# Altium PCB Power.PcbDoc
Units mil, origin at the board's own origin, x right, y up, seen from the top; angles counter-clockwise.
Board outline 1220.47 x 2874.02 mil, 2 copper layers (Top Layer, Bottom Layer), stack 21 mil thick; 108 components, 65 nets, 355 pads, 203 vias.
Unrouted connection lines stored in the file: 51.
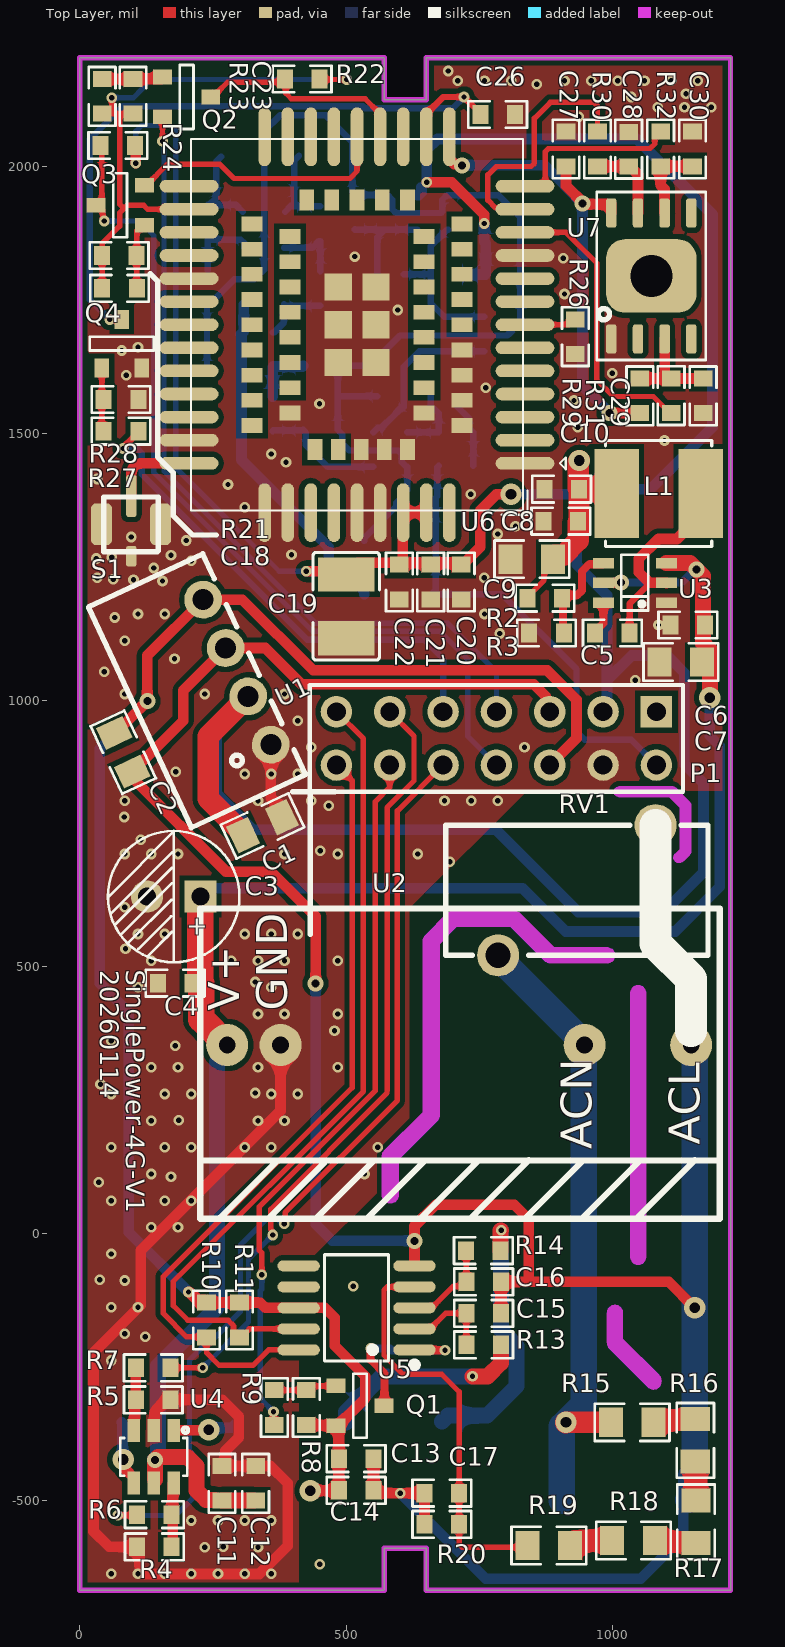
[diagram p0: Top Layer view]
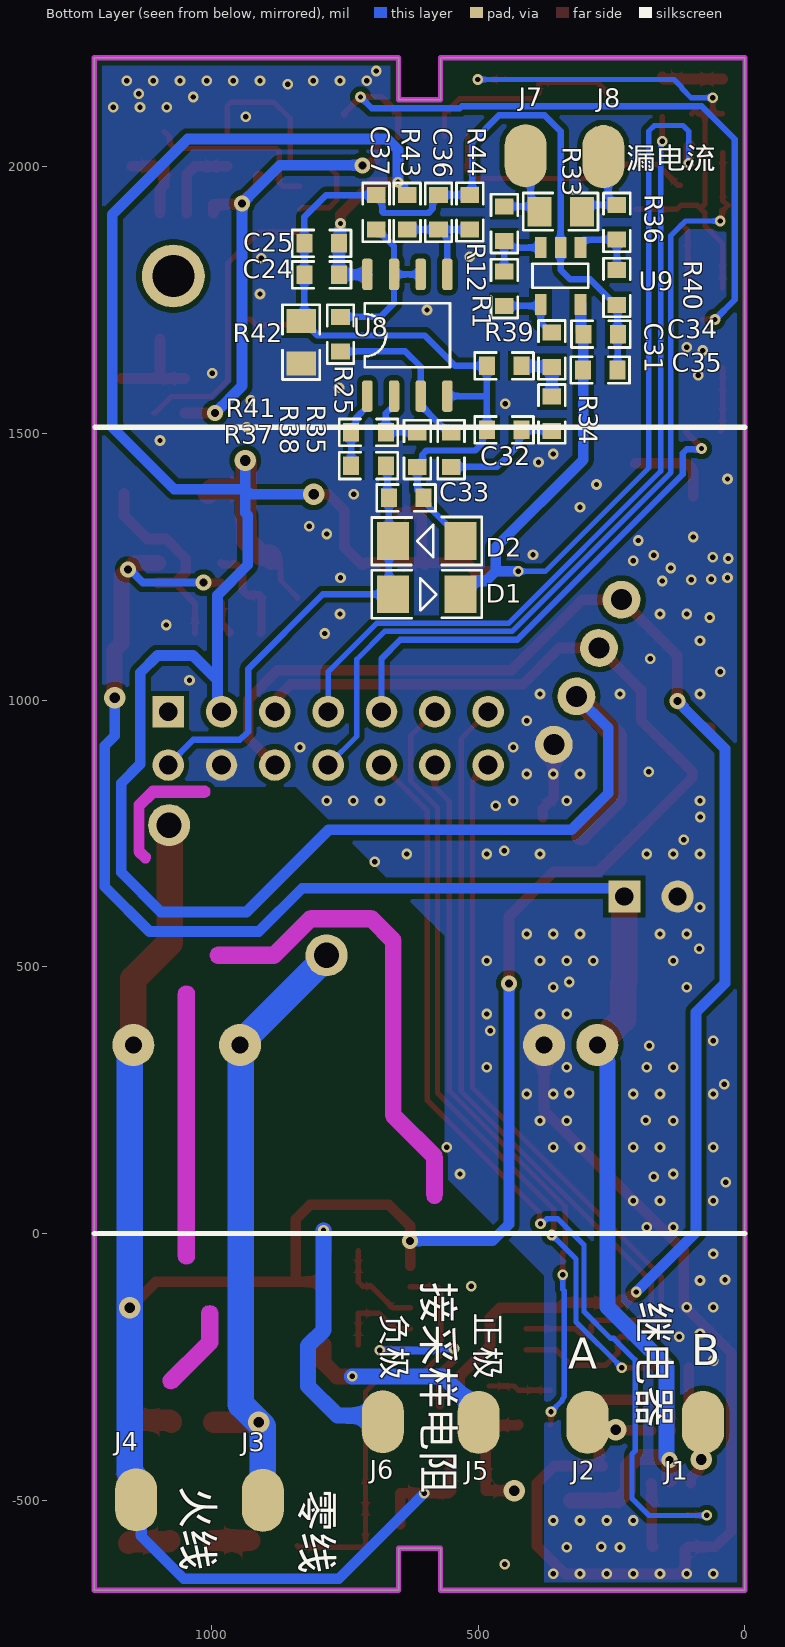
[diagram p1: Bottom Layer view, seen from below]

## Layer stack, top to bottom
Top Solder: solder mask 0.4, Solder Resist, Dk 3.5
Top Layer: signal copper 1.4
Dielectric 2: prepreg 2.8, Composite dielectric, Dk 4.1
Dielectric 1: prepreg 12.6, Composite dielectric, Dk 4.1
Dielectric 3: prepreg 2.8, Composite dielectric, Dk 4.1
Bottom Layer: signal copper 1.4
Bottom Solder: solder mask 0.4, Solder Resist, Dk 3.5

## Board outline
0,-669.29 0,2204.72 570.87,2204.72 570.87,2125.98 649.61,2125.98 649.61,2204.72 1220.47,2204.72 1220.47,-669.29 649.61,-669.29 649.61,-590.55 570.87,-590.55 570.87,-669.29
cut-out: 567.17,71.31 567.17,144.13 cw(c582.18,144.13) 571.58,154.76 571.56,154.75 644.25,227.44 644.25,548.67 cw(c659.27,548.67) 648.66,559.3 648.65,559.29 689.62,600.26 689.61,600.25 cw(c700.24,589.64) 700.24,604.66 814.69,604.66 cw(c814.69,589.64) 825.32,600.25 825.31,600.26 889.11,536.46 988.56,536.46 cw(c988.56,521.44) 1003.57,521.44 cw(c988.56,521.44) 988.56,506.43 882.89,506.43 cw(c882.89,521.44) 872.26,510.84 872.28,510.82 808.47,574.63 706.46,574.63 674.28,542.45 674.28,221.22 cw(c659.27,221.22) 669.87,210.59 669.88,210.6 597.19,137.91 597.19,71.31 cw(c582.18,71.31)
cut-out: 1124.18,694.8 cw(c1124.18,704.82) 1118.61,713.14 1126.16,720.68 1126.16,798.25 1106.2,818.21 1012.22,818.21 cw(c1012.22,828.23) 1012.22,838.24 1110.34,838.24 cw(c1110.34,828.23) 1117.43,835.31 1143.25,809.48 cw(c1136.17,802.4) 1146.19,802.4 1146.19,716.53 cw(c1136.17,716.53) 1143.25,709.45 1131.54,697.73 cw(c1124.45,704.82) 1124.45,694.8
cut-out: 1032.29,-43.1 ccw(c1047.3,-43.1) 1062.32,-43.1 1062.32,449.84 ccw(c1047.3,449.84) 1032.29,449.84
cut-out: 988.7,-204.62 ccw(c1003.72,-204.62) 993.11,-215.25 993.1,-215.24 1065.45,-287.59 ccw(c1076.06,-276.97) 1091.08,-276.97 ccw(c1076.06,-276.97) 1086.68,-266.35 1018.73,-198.4 1018.73,-149.81 ccw(c1003.72,-149.81) 988.7,-149.81

## Design rules (kind name [scope] priority, off if disabled: settings)
Clearance "Via to pad" [IsVia vs IsPad] p1: gap=10 ignorepadtopadclearanceinfootprint=FALSE
Clearance Ploy [InPoly] p2: gap=10 ignorepadtopadclearanceinfootprint=FALSE
Clearance "Track to pad" [IsTrack vs IsPad] p3: gap=8 ignorepadtopadclearanceinfootprint=FALSE
Clearance "Track to track" [IsTrack vs IsTrack] p4: gap=5 ignorepadtopadclearanceinfootprint=FALSE
Clearance "Via to Track" [IsVia vs IsTrack] p5: gap=10 ignorepadtopadclearanceinfootprint=FALSE
Clearance "Via To Via" [IsVia vs IsVia] p6: gap=10 ignorepadtopadclearanceinfootprint=FALSE
ComponentClearance [All] p1: gap=0 collisioncheckmode=3 verticalgap=0 showdistances=FALSE
DiffPairsRouting [All] p1: maxlimit=10 minlimit=7 mostfreqgap=7 toplayer_minwidth=5 toplayer_maxwidth=100 toplayer_prefwidth=7 bottomlayer_minwidth=5 bottomlayer_maxwidth=100 bottomlayer_prefwidth=7 maxuncoupledlength=500
HoleSize [All] p1: absolutevalues=TRUE maxlimit=200 minlimit=1 maxpercent=80.000 minpercent=20.000
HoleToHoleClearance [All] p1: gap=5 allowstackedmicrovias=TRUE
MinimumSolderMaskSliver [All] p1: minsoldermaskwidth=0
PolygonConnect [All vs (InPadClass('All Pads'))] p1: connectstyle=Direct reliefconductorwidth=10 reliefentries=4 polygonreliefangle="90 Angle" airgapwidth=10
PolygonConnect GND焊盘 [InNet('GND_1') vs (InPadClass('All Pads'))] p2: connectstyle=Relief reliefconductorwidth=10 reliefentries=4 polygonreliefangle="90 Angle" airgapwidth=10
PolygonConnect GND过孔 [All vs IsVia] p3: connectstyle=Direct reliefconductorwidth=10 reliefentries=4 polygonreliefangle="90 Angle" airgapwidth=10
RoutingVias RoutingVias_1 [InNet('AGND_1')] p1: holewidth=10 width=20 viastyle="Through Hole" minholewidth=10 minwidth=20 maxholewidth=28 maxwidth=50
RoutingVias [All] p2: holewidth=10 width=20 viastyle="Through Hole" minholewidth=10 minwidth=20 maxholewidth=28 maxwidth=50
SilkToSilkClearance [All] p1: silktosilkclearance=0
SilkToSolderMaskClearance [IsPad] p1: minsilkscreentomaskgap=0 clearancetoexposedcopper=TRUE
SolderMaskExpansion [All] p1: expansion=1 istentingtop=FALSE
Width [All] p1: maxlimit=300 minlimit=5 preferedwidth=7 minimp=50.000000 maximp=50.000000 favimp=50.000000
23 further rules are at their usual default settings.

## Classes and differential pairs
component class 漏电流检测: C24 C25 C31 C32 C33 C35 C36 C37 D1 D2 J7 J8 R1 R12 R25 R33 R34 R35 R36 R37 R38 R39 R40 R41 R42 R43 R44 U8 U9
component class 连接: P1
component class 继电器: C11 C12 J1 J2 R4 R5 R6 R7 U4
component class Power: C3 C4 C5 C6 C7 C8 C9 C10 L1 R2 R3 U2 U3
component class 4G: C18 C19 C20 C21 C22 C23 C26 C27 C28 C29 C30 Q2 Q3 Q4 R21 R22 R23 R24 R26 R27 R28 R29 R30 R31 R32 S1 U6 U7
component class 计量: C1 C2 C13 C14 C15 C16 C17 J3 J4 J5 J6 Q1 R8 R9 R10 R11 R13 R14 R15 R16 R17 R18 R19 R20 U1 U5

## Components (designator, comment, footprint, x,y, rotation, side; value= is the part's Value field where it differs from the comment)
C1 "4.7uF/25V" 0805R 306.58,746.97 r25 top
C2 "10uF/25V" 0805R 64.81,938.5 r295 top
C3 "100uF/25V" CAPPIND06 226.33,631.7 r180 top
C4 "104/25V" 0603R 146.72,469.16 r0 top
C5 "104/25V" 0603R 1031.23,1125.73 r180 top
C6 "10uF/25V" 0603R 1107.93,1140.82 r0 top
C7 "22uF/25V" 0805R 1167.2,1071.37 r180 top
C8 "10uF/25V" 0603R 869.67,1335.55 r0 top
C9 "47uF/10V" 0805R 887.91,1264.28 r180 top
C10 "104/10V" 0603R 871.31,1395.66 r0 top
C11 "22uF/25V" 0603R 266.89,-435.99 r270 top
C12 "104/25V" 0603R 330.17,-435.99 r270 top
C13 "104/25V" 0603R 551.09,-422.5 r180 top
C14 "10uF/25V" 0603R 551.09,-481.76 r180 top
C15 "68nF/10V" 0603R 725.1,-149.81 r0 top
C16 "68nF/10V" 0603R 725.1,-90.67 r0 top
C17 "10nF/10V" 0603R 711.6,-487.03 r180 top
C18 "1nF/10V/0603" 0603R 107.09,1772.25 r180 top
C19 "100uF/10V" C1210 499.88,1175.97 r270 top
C20 "10pF" 0603R 715.52,1253.93 r270 top
C21 "33pF" 0603R 658.09,1254.13 r270 top
C22 "100nF" 0603R 599.46,1253.93 r270 top
C23 "1nF/10V/0603" 0603R 100.03,2164.57 r270 top
C24 "10uF" 0603R 826.27,1797.55 r180 bottom
C25 "10uF" 0603R 826.27,1856.71 r180 bottom
C26 "10nF" 0603R 816.36,2097.98 r180 top
C27 "104" 0603R 912.04,2065.94 r270 top
C28 "33PF" 0603R 1029.32,2000.76 r90 top
C29 "33PF" 0603R 1169.25,1538.15 r90 top
C30 "33PF" 0603R 1149.32,2000.94 r90 top
C31 "0.1uF" 0603R 362.05,1624.41 r90 bottom
C32 "0.1uF" 0603R 419,1506.93 r0 bottom
C33 "0.1uF" 0603R 667.73,1379.35 r180 bottom
C34 "10uF" 0603R 237.62,1686.33 r0 bottom
C35 "0.1uF" 0603R 239.11,1619.1 r0 bottom
C36 "100nF/16V" 0603R 574.74,1882.26 r90 bottom
C37 "100nF/16V" 0603R 691.43,1882.06 r90 bottom
D1 "1N4148" 1206D 596.77,1198.48 r180 bottom
D2 "1N4148" 1206D 596.77,1298.44 r0 bottom
J1 "J1" 贴片焊盘V1（3*2椭圆） 78.74,-354.33 r270 bottom
J2 "J1" 贴片焊盘V1（3*2椭圆） 295.28,-354.33 r270 bottom
J3 "J1" 贴片焊盘V1（3*2椭圆） 904.13,-500.7 r270 bottom
J4 "J1" 贴片焊盘V1（3*2椭圆） 1141.73,-499.72 r270 bottom
J5 "J1" 贴片焊盘V1（3*2椭圆） 499.45,-354.33 r90 bottom locked
J6 "J1" 贴片焊盘V1（3*2椭圆） 679,-353 r270 bottom locked
J7 "J1" 贴片焊盘V1（3*2椭圆） 411.36,2020.83 r270 bottom
J8 "J1" 贴片焊盘V1（3*2椭圆） 265.46,2019.27 r270 bottom
L1 "4.7uH/3A" 贴片电感5020 1164.48,1387.51 r0 top
P1 "Header 7X2" HDR2X7 1081.52,978.23 r180 top
Q1 "AO3401" SOT-23 480.47,-285.9 r270 top
Q2 "S8050" SOT-23 155.35,2168.44 r270 top
Q3 "S8050" SOT-23 121.27,1890.5 r90 top
Q4 "S8050" SOT-23 41.61,1623.14 r0 top
R1 "300K/1%/0603" 0603r 451.35,1739.18 r90 bottom
R2 "40.2K" 0603R 839.68,1191.05 r0 top
R3 "103" 0603R 907.98,1125.73 r180 top
R4 "4.7K/5%" 0603R 107.46,-587.82 r0 top
R5 "4.7K/5%" 0603R 170.5,-311.98 r180 top
R6 "100R/5%" 0603r 107.45,-527.5 r0 top
R7 "100R/5%" 0603R 105.5,-251.97 r0 top
R8 "47K/5%/0603" 0603R 425.2,-293.88 r270 top
R9 "4.7K/5%/0603" 0603R 365.02,-293.88 r270 top
R10 "2K/5%/0603" 0603R 237.73,-194.78 r90 top
R11 "2K/5%/0603" 0603R 299.83,-194.78 r90 top
R12 "1K/1%/0603" 0603r 451.35,1925.85 r270 bottom
R13 "510R/1%" 0603R 790.1,-208.86 r180 top
R14 "510R/1%" 0603R 789.57,-32.38 r180 top
R15 "390K" 0805R 1076.06,-354.33 r180 top
R16 "390K" 0805R 1154.51,-428.09 r90 top
R17 "390K" 0805R 1155.81,-580.7 r90 top
R18 "390K" 0805R 998.58,-575.7 r0 top
R19 "390K" 0805R 839.83,-585.22 r0 top
R20 "510R/1%" 0603R 646.6,-545.57 r0 top
R21 "4.7K/5%/0603" 0603R 106.61,1833.82 r180 top
R22 "10K/5%/0603" 0603R 449.61,2164.57 r180 top
R23 "4.7K/5%/0603" 0603R 42.09,2164.57 r270 top
R24 "10K/5%/0603" 0603R 39.08,2039.9 r0 top
R25 "10K/1%/0603" 0603r 758.57,1718.85 r270 bottom
R26 "4.7K" 0603R 929.34,1714.05 r270 top
R27 "4.7K" 0603R 110.13,1504.43 r180 top
R28 "47K" 0603R 45.14,1563.85 r0 top
R29 "10K" 0603R 1050.33,1538.15 r90 top
R30 "0R" 0603R 971.08,2000.94 r90 top
R31 "0R" 0603R 1109.08,1538.34 r90 top
R32 "0R" 0603R 1089.34,2000.94 r90 top
R33 "100R/1%" 0805R 305.6,1916.07 r0 bottom
R34 "15.8K/1%/0603" 0603r 362.05,1504.43 r90 bottom
R35 "10K/1%/0603" 0603r 550.89,1502.24 r270 bottom
R36 "1K/1%/0603" 0603r 240.13,1863.57 r90 bottom
R37 "100R/1%/0603" 0603r 673.3,1439.74 r0 bottom
R38 "10K/1%/0603" 0603r 614.4,1502.24 r270 bottom
R39 "150K/1%/0603" 0603r 484,1626.91 r180 bottom
R40 "300K/1%/0603" 0603r 240.13,1741.35 r90 bottom
R41 "10K/1%/0603" 0603r 738.3,1502.24 r180 bottom
R42 "0R/5%/0805" 0805R 832.15,1631.35 r90 bottom
R43 "20K/1%/0603" 0603r 633.39,1947.06 r270 bottom
R44 "20K/1%/0603" 0603r 515.9,1882.65 r90 bottom
RV1 "7S561K" 10D821K 932.24,643.49 r0 top
S1 "SMA" RF1-00283天线座 44.88,1380.79 r0 top
U1 "B0303S" B1205S-1WR3 1005.71,-606.96 r115 top
U2 "X1071    90-240V" X1071 1146.8,353.29 r180 top locked
U3 "DIO6930" SOT-23-6DBV 1100.3,1182.32 r90 top
U4 "BL8023FCBT6R" SOT-23-6 176.33,-369.85 r180 top
U5 "BL0942" BL0942-10pin 627.79,-218.29 r90 top
U6 "ML307A" ML307A 520.15,1703.9 r180 top locked
U7 "SIM_MFF2" VQFN8 1071.95,1795.33 r90 top
U8 "LM258" SO8 708.09,1570.04 r90 bottom
U9 "LM321MFX" SOT-23-5 308.4,1848.55 r0 bottom

## Footprints (in the part's own frame and the unit in brackets; to place one, negate y for a bottom-side part, rotate by r counter-clockwise, add the part's x,y. Pads: shape width x height; smd on the part's side, far side on the other; paste and mask are expansions set on the pad)
10D821K [mm]
  round 2 hole 1.2 copper offset 0,0: 1(-3.75,-3.1) 2(3.75,3.1)
  silkscreen extent -6.25,-3.1 6.25,3.1
0603R [mil]
  rect 30x35 smd: 1(0,0) 2(65,0)
  silkscreen extent -22,-25 88,25
0603r [mil]
  rect 30x35 smd: 1(0,0) 2(65,0)
  silkscreen extent -22,-25 88,25
0805R [mil]
  rect 45x55 smd: 1(0,0) 2(80,0)
  silkscreen extent -30,-35 110,35
1206D [mm]
  rect 1.524x1.8 smd: 1(1.6,0) 2(-1.6,0)
  silkscreen extent -2.62,-1.14 2.62,1.14
B1205S-1WR3 [mm]
  round 1.8 hole 1: 1(42.019,-1.451) 2(44.559,-1.451) 3(47.099,-1.451) 4(49.639,-1.451)
  silkscreen extent 40.03,-2.35 51.63,3.65
BL0942-10pin [mm]
  oval 0.525x2.014 smd: 1(0,0) 2(1,0) 3(2,0) 4(3,0) 5(4,0) 6(4,5.513) 7(3,5.513) 8(2,5.513) 9(1,5.513) 10(0,5.513)
  silkscreen extent -0.86,-0.15 4.53,4.28
C1210 [mm]
  rect 1.635x2.7 smd paste-100 mask+0.051: 1(-1.517,0) 2(1.517,0)
  silkscreen extent -2.56,-1.58 2.56,1.58
CAPPIND06 [mil]
  rect 60x60 hole 34: 1(0,0)
  round 60 hole 34: 2(100,0)
  silkscreen extent -73,-123 173,123
HDR2X7 [mm] "Connector; Header; 7x2 Position"
  rect 1.5x1.5 hole 0.9: 1(0,0)
  round 1.5 hole 0.9: 2(0,2.54) 3(2.54,0) 4(2.54,2.54) 5(5.08,0) 6(5.08,2.54) 7(7.62,0) 8(7.62,2.54) 9(10.16,0) 10(10.16,2.54) 11(12.7,0) 12(12.7,2.54) 13(15.24,0) 14(15.24,2.54)
  silkscreen extent -1.27,-1.27 16.51,3.81
ML307A [mm]
  oval 2.8x0.6 smd: 1(-8,6.6) 2(-8,5.5) 3(-8,4.4) 4(-8,3.3) 5(-8,2.2) 6(-8,1.1) 7(-8,0) 8(-8,-1.1) 9(-8,-2.2) 10(-8,-3.3) 11(-8,-4.4) 12(-8,-5.5) 13(-8,-6.6) 23(8,-6.6) 24(8,-5.5) 25(8,-4.4) 26(8,-3.3) 27(8,-2.2) 28(8,-1.1) 29(8,0) 30(8,1.1) 31(8,2.2) 32(8,3.3) 33(8,4.4) 34(8,5.5) 35(8,6.6)
  oval 0.6x2.8 smd: 14(-4.4,-8.95) 15(-3.3,-8.95) 16(-2.2,-8.95) 17(-1.1,-8.95) 18(0,-8.95) 19(1.1,-8.95) 20(2.2,-8.95) 21(3.3,-8.95) 22(4.4,-8.95) 36(4.4,8.95) 37(3.3,8.95) 38(2.2,8.95) 39(1.1,8.95) 40(0,8.95) 41(-1.1,8.95) 42(-2.2,8.95) 43(-3.3,8.95) 44(-4.4,8.95)
  rect 1x0.7 smd: 45(-5,4.8) 46(-5,3.6) 47(-5,2.4) 48(-5,1.2) 49(-5,0) 50(-5,-1.2) 51(-5,-2.4) 52(-5,-3.6) 53(-5,-4.8) 59(5,-4.8) 60(5,-3.6) 61(5,-2.4) 62(5,-1.2) 63(5,0) 64(5,1.2) 65(5,2.4) 66(5,3.6) 67(5,4.8) 73(-3.2,4.2) 74(-3.2,3) 75(-3.2,1.8) 76(-3.2,0.6) 77(-3.2,-0.6) 78(-3.2,-1.8) 79(-3.2,-3) 80(-3.2,-4.2) 81(3.2,-4.2) 82(3.2,-3) 83(3.2,-1.8) 84(3.2,-0.6) 85(3.2,0.6) 86(3.2,1.8) 87(3.2,3) 88(3.2,4.2)
  rect 0.7x1 smd: 54(-2.4,-5.95) 55(-1.2,-5.95) 56(0,-5.95) 57(1.2,-5.95) 58(2.4,-5.95) 68(2,5.95) 69(0.9,5.95) 70(-0.2,5.95) 71(-1.3,5.95) 72(-2.4,5.95)
  rect 1.3x1.3 smd: 89(-0.9,1.8) 90(-0.9,0) 91(-0.9,-1.8) 92(0.9,-1.8) 93(0.9,0) 94(0.9,1.8)
  silkscreen extent -9.94,-8.85 7.9,9.05
RF1-00283天线座 [mil]
  rrect50% 19.68x78.74 smd: 1(52,2)
  rrect50% 39.37x78.74 smd: 2(-4,-51) 2(107,-51)
  rrect50% 19.68x39.37 smd: 2(52,-111)
  silkscreen extent 0,-102 102,0
SO8 [mm]
  rrect50% 1.5x0.5 smd: 1(0,0) 2(0,-1.27) 3(0,-2.54) 4(0,-3.81) 5(5.8,-3.81) 6(5.8,-2.54) 7(5.8,-1.27) 8(5.8,0)
  silkscreen extent 1.38,-3.94 4.42,0.13
SOT-23 [mm]
  rect 0.7x0.9 smd: 1(0,0) 2(1.9,0) 3(0.95,2.3)
  silkscreen extent -0.57,0.82 2.47,1.47
SOT-23-5 [mm]
  rect 0.55x1 smd: 1(0,0) 2(0.95,0) 3(1.9,0) 4(1.9,2.7) 5(0,2.7)
  silkscreen extent -0.37,0.76 2.29,1.91
SOT-23-6 [mm]
  rect 0.6x1.1 smd: 1(0,0) 2(0.95,0) 3(1.9,0) 4(1.9,2.5) 5(0.95,2.5) 6(0,2.5)
  silkscreen extent -0.69,-0.15 2.55,2.15
SOT-23-6DBV [mm]
  rect 0.5x1 smd: 1(0,0) 2(0.95,0) 3(1.9,0) 4(1.9,3) 5(0.95,3) 6(0,3)
  silkscreen extent -0.37,0.86 2.29,2.16
VQFN8 [mm]
  rrect50% 3.5x4.3 smd: 0(0,0)
  round 3 hole 2: 0(0,0)
  rrect50% 1.4x0.5 smd: 1(-3,1.905) 2(-3,0.635) 3(-3,-0.635) 4(-3,-1.905) 5(3,-1.905) 6(3,-0.635) 7(3,0.635) 8(3,1.905)
  silkscreen extent -4,-2.6 4,2.6
X1071 [mm]
  round 2 hole 0.8: 1(0,0) 2(5.08,0) 4(19.56,0) 5(22.1,0)
  silkscreen extent -1.36,-6.5 23.38,8.28
贴片焊盘V1（3*2椭圆） [mm]
  oval 3x2 smd: 1(0,0)
贴片电感5020 [mm]
  rect 2.124x4.22 smd: 1(0,0) 2(-4,0)
  silkscreen extent -4.53,-2.53 0.53,2.53

## Part data
C1 C2: library part CAP+
C3 C7 C9 C19: library part "Cap Pol1", "Polarized Capacitor (Radial)", LatestRevisionDate=17-Jul-2002, LatestRevisionNote="Re-released for DXP Platform.", PackageDescription="Polarized Capacitor (Radial); 2 Leads", PackageReference=RB7.6-15, Published=8-Jun-2000, Publisher="Altium Limited"
C4 C5 C10 C11 C12 C13 C14 C20 C21 C22 C26: library part CAP_1
C6 C8 C15 C16 C17 C18 C23 C24 C25 C27 C28 C29 C30 C31 C32 C33 C34 C35 C36 C37: library part CAP
D1 D2: library part DIODE
L1: library part Inductor, "Inductor", Code_IEC=1005, Code_JEITA=0402, LatestRevisionDate=29-May-2009, LatestRevisionNote="IPC-7351 Footprint Added.", PackageDescription="Chip Inductor", PackageReference=0402-A, Published=8-Jun-2000, Publisher="Altium Limited"
P1: "Header, 7-Pin, Dual row", LatestRevisionDate=17-Jul-2002, LatestRevisionNote="Re-released for DXP Platform.", Publisher="Altium Limited"
Q1: library part PNP
Q2 Q3 Q4: library part NPN
R1 R4 R5 R6 R7 R8 R9 R10 R11 R12 R13 R14 R15 R16 R17 R18 R19 R20 R21 R23 R25 R26 R27 R28 R33 R34 R35 R36 R37 R38 R39 R40 R41 R42 R43 R44: library part RES
R2 R3 R22 R24 R29 R30 R31 R32: library part Res2, "Resistor", LatestRevisionDate=17-Jul-2002, LatestRevisionNote="Re-released for DXP Platform.", PackageDescription="Axial Device, Thru-Hole; 2 Leads; 0.4 in Pin Spacing", PackageReference=AXIAL-0.4, Published=8-Jun-2000, Publisher="Altium Limited"
RV1: library part "Res Varistor", "Varistor (Voltage-Sensitive Resistor)", Code_IPC=RESC2012, LatestRevisionDate=29-May-2009, LatestRevisionNote="IPC-7351 Footprint Added.", PackageDescription="Chip Resistor 0805 Case Size", PackageReference=6-0805, PackageVersion=Mar-2003, Published=24-Mar-1999, Publisher="Altium Limited"
U1: library part B0505S
U2: library part AD2DC_EMC
U3: library part BL8032
U4: library part BL8023HCB6TR, JLCPCB Part Class="Extended Part", LCSC Part Name="BL8023HCB6TR 继电器驱动芯片 停产", Manufacturer=BL(上海贝岭), Add into BOM=yes, Convert to PCB=yes, Datasheet=https://atta.szlcsc.com/upload/public/pdf/source/20190920/C431145_DEC39E836DB2A2F1462A8BB350F12ABB.pdf, Device=BL8023HCB6TR, Manufacturer Part=BL8023HCB6TR, Supplier=LCSC, Supplier Footprint=SOT-23-6, Supplier Part=C431145, Symbol=BL8023HCB6TR
U5: library part BL0942_C2837510, JLCPCB Part Class="Extended Part", LCSC Part Name=BL0942内置时钟免校准计量芯片, Manufacturer=BL(上海贝岭), Add into BOM=yes, Convert to PCB=yes, Datasheet=https://atta.szlcsc.com/upload/public/pdf/source/20220627/BFAD44701CA6DE9A8853C5A4834B6884.pdf, Device=BL0942_C2837510, Manufacturer Part=BL0942, Supplier=LCSC, Supplier Footprint=SSOP-10-150mil, Supplier Part=C2837510, Symbol=BL0942
U8: library part LM358
U6: PCB DECAL=MOD_ML307

## Via types
v1: diameter 20, hole 10, Top Layer to Bottom Layer, 186 vias
v2: diameter 30, hole 15, Top Layer to Bottom Layer, 9 vias
v3: diameter 40, hole 20, Top Layer to Bottom Layer, 8 vias

## Nets (pads, with @x,y where several pads share a name; then routed paths per layer and width w, separated by ;. In a path a pad name is that pad's centre, name@x,y a point inside that pad or via, vN(x,y) a via of type N, cw(c..) or ccw(c..) an arc to the next point about the centre after c; other vN are vias at no path point)
4G_MCU_RXD: P1.8 Q3.3 R24.1 | length 1644.6
  Top Layer w10: Q3.3 32.83,1927.9 41.61,1936.68 R24.1@41.61,2026.33 ; Q3.3@31.3,1927.9 40.08,1919.12 43.44,1919.12 43.44,1903.85 46.12,1901.17 v1(46.12,1898.47)
  Bottom Layer w10: v1(46.12,1898.47) 111.61,1898.47 139.01,1871.06 139.01,1427 437.04,1128.98 675.54,1128.98 728.02,1076.5 728.02,931.73 P1.8
4G_MCU_TXD: P1.7 Q2.2 | length 1519.6
  Top Layer w10: v1(155.35,2048.26) Q2.2
  Bottom Layer w10: v1(155.35,2048.26) 157.27,2046.35 157.27,2039.27 158.15,2038.39 158.15,1429.25 443.42,1143.98 690.62,1143.98 781.52,1053.08 P1.7
4G_Reset: P1.9 R27.1 | length 930.7
  Top Layer w12: v1(81.38,1471.68) 81.38,1473.18 110.13,1501.93 R27.1
  Bottom Layer w12: v1(81.38,1471.68) 82.79,1470.27 109.38,1470.27 116.61,1463.04 116.61,1423.39 427.02,1112.98 646.19,1112.98 681.52,1077.65 P1.9
AGND: C24.1 C25.1 C32.2 C33.2 C34.1 C35.1 C36.2 C37.2 D2.2 R38.2 R39.1 R40.1 R42.2 R44.2 U8.4 U9.2 | length 2312.8
  Bottom Layer w12: C35.1@238.6,1626.91 238.87,1627.19 238.87,1740.1 R40.1 242.63,1741.35 290.13,1788.85 327.55,1788.85 345.8,1807.1 U9.2 345.8,2066.6 375.59,2096.39 461.45,2096.39 511.49,2046.36 511.49,1952.06 516.09,1947.45 574.55,1947.45 C36.2 577.24,1947.26 586.24,1938.26 586.24,1920.47 593.27,1913.44 677.77,1913.44 679.93,1915.6 679.93,1938.06 688.93,1947.06 C37.2 785.15,1947.06 826.27,1905.95 C24.1 826.27,1717.23 R42.2 827.15,1711.35 810.65,1694.85 810.65,1692.73 801.7,1683.78 600.61,1683.78 543.73,1626.91 R39.1 484,1566.92 ; D2.2 533.78,1303.87 593.73,1363.83 593.73,1370.35 C33.2 602.73,1381.85 614.4,1393.52 R38.2 613.3,1437.24 604.3,1446.24 604.3,1461.1 597.27,1468.13 505.66,1468.13 492.4,1481.38 492.4,1498.53 C32.2 484,1566.92 ; U8.4 487.12,1570.04 484,1566.92
BL0942_Control: P1.12 R9.2 | length 1351.5
  Top Layer w10: v1(341.72,-77.43) 341.72,-36.37 337.04,-31.69 337.04,50.29 554.53,267.78 554.53,809.9 581.52,836.89 P1.12 ; v1(363.58,-334.61) 363.58,-357.43 R9.2
  Bottom Layer w10: v1(341.72,-77.43) 341.72,-104.64 338.93,-107.43 338.93,-305.72 cw(c295.28,-334.65) 343.72,-314.75 v1(363.58,-334.61)
BL0942_RXD: P1.13 R11.1 U5.9 | length 1555.8
  Top Layer w10: U5.9 318.19,-178.92 302.33,-194.78 298.24,-194.78 288.24,-184.78 288.24,-172.65 278.37,-162.79 202.85,-162.79 175.43,-135.37 175.43,-90.1 532,266.47 532,927.75 P1.13
BL0942_TXD: P1.14 R10.1 U5.10 | length 1508.8
  Top Layer w10: U5.10 354.07,-218.29 324.88,-247.48 261.75,-247.48 237.73,-223.46 237.73,-197.28 234.46,-194.01 200.72,-194.01 157,-150.29 157,-80.8 511,273.2 511,848.75 P1.14
GND: C1.2 C3.2 C4.1 C6.1 C7.2 C8.1 C9.2 C10.1 C11.1 C12.1 C19.2 C20.2 C21.2 C22.2 C26.1 C27.1 C28.2 C29.1 C30.2 P1.4 Q4.2 R3.2 R4.1 R5.1 R26.2 R28.2 R42.1 S1.2 U1.1 U2.4 U3.1 U4.2 U6.1 U6.10 U6.27 U6.34 U6.36 U6.37 U6.40 U6.41 U6.45 U6.46 U6.47 U6.48 U6.70 U6.71 U6.72 U6.73 U6.88 U6.89 U6.90 U6.91 U6.92 U6.93 U6.94 U7.1 | length 2228.5
  Top Layer w20: U4.2 140.74,-368.03 140.74,-334.44 155.7,-319.48 165.5,-319.48 170.5,-314.48 R5.1 267.05,-311.98 278.34,-323.27 298.24,-343.17 298.24,-382.54 273.3,-407.48 273.3,-430.99 268.3,-435.99 C11.1 ; C11.1@269.39,-435.99 C12.1 357.67,-435.99 390.02,-468.34 390.02,-585.7 337.02,-638.7 124.17,-638.7 112.46,-626.99 112.46,-592.82 R4.1 55.54,-587.82 26,-558.28 26,-223.53 114.7,-134.84 114.7,-32.13 376.72,229.89 U2.4 ; U1.1@358.35,929.2 U1.1 358.35,817.08 379.08,796.35 C1.2
  other v1: 59.27,-638.44 109.27,-638.44 159.27,-638.44 209.27,-638.44 259.27,-638.44 309.27,-638.44 359.27,-638.44 234.27,-588.44 334.27,-588.44 269.39,-587.82 209.27,-538.44 259.27,-538.44 309.27,-538.44 359.27,-538.44 59.27,-238.44 123,-194.01 84.27,-188.44 59.27,-138.44 109.27,-138.44 84.27,-88.44 37.39,-87.04 59.27,-38.44 134.27,11.56 184.27,11.56 59.27,61.56 159.27,61.56 209.27,61.56 36,96 171.33,106 134.27,111.56 534.27,111.56 59.27,161.56 159.27,161.56 209.27,161.56 309.27,161.56 359.27,161.56 559.27,161.56 134.27,211.56 186,212 334.27,211.56 384.27,211.56 59.27,261.56 159.27,261.56 209.27,261.56 359.27,261.56 409.27,261.56 329.35,263.2 39.02,279.55 134.27,311.56 184.27,311.56 334.27,311.56 484.27,311.56 179.56,351.95 59.27,361.56 477.88,380 334.27,411.56 384.27,411.56 484.27,411.56 109.27,461.56 359.27,461.56 329.35,471.32 134.27,511.56 284.27,511.56 334.27,511.56 384.27,511.56 484.27,511.56 85.84,533.7 109.27,561.56 159.27,561.56 309.27,561.56 359.27,561.56 409.27,561.56 84.27,611.56 694.07,696.93 84.27,711.56 134.27,711.56 184.27,711.56 384.27,711.56 484.27,711.56 634.27,711.56 451.21,717.45 114.7,738.4 83.86,780.78 467.37,801.93 84.27,811.56 334.27,811.56 434.27,811.56 684.27,811.56 734.27,811.56 784.27,811.56 309.27,861.56 359.27,861.56 409.27,861.56 180.35,866 434.27,911.56 834.27,911.56 409.27,961.56 84.27,1011.56 234.27,1011.56 384.27,1011.56 1041.56,1037.57 46.12,1053.08 177.8,1077.65 84.27,1111.56 787.73,1124.79 1085.43,1140.82 65.83,1155.04 109.27,1161.56 159.27,1161.56 759.27,1161.56 155.35,1223.45 100.82,1225.42 63.08,1226.96 32.83,1229.62 758.57,1229.62 139.01,1247.7 209.27,1261.56 31.3,1265.56 60.33,1267.9 171.33,1271.78 397.37,1272.32 200.09,1299.28 96.88,1305.77 784.27,1311.56 817.18,1325.75 309.27,1361.56 733.57,1385.77 278.27,1404.35 32.83,1414.74 387.05,1446.24 359.27,1461.56 1096.8,1486.97 934.27,1511.56 449.61,1555.84 926.84,1561.69 761.27,1585.64 87.53,1609.42 998.85,1612.97 79.01,1655.62 109.27,1661.56 596.18,1731.47 909.27,1761.56 906.89,1828.46 516.09,1831.71 936.03,2093.61 1084.27,2111.56 1134.27,2111.56 1184.27,2111.56 1034.56,2131.04 1136.92,2137.26 857.18,2154.88 709.27,2161.56 759.27,2161.56 809.27,2161.56 909.27,2161.56 959.27,2161.56 1009.27,2161.56 1059.27,2161.56 1109.27,2161.56 1159.27,2161.56 691.43,2179.67
IN1: C16.1 R14.2 U5.3 | length 176.1
  Top Layer w10: U5.3 659.98,-139.55 665.31,-134.22 665.64,-134.22 700.96,-98.9 716.87,-98.9 C16.1 725.1,-87.04 725.1,-32.91 R14.2
IP1: C15.1 R13.2 U5.2 | length 170.6
  Top Layer w10: U5.2@629.33,-177.38 U5.2 657.09,-178.92 686.21,-149.81 C15.1 R13.2
Lin: C2.2 C13.1 C14.1 C15.2 C16.2 C17.2 J4.1 P1.5 R20.1 RV1.2 U1.3 U2.1 U5.5 | length 5284.8
  Top Layer w20: v2(442.49,468.9) 442.49,594.27 358.27,678.49 274.47,678.49 98.62,854.33 C2.2 194.22,961.59 194.22,1018.12 U1.3 348.14,1097.73 416.01,1029.86 851.73,1029.86 874.05,1007.54 874.05,985.7 P1.5 ; C13.1 C14.1 551.09,-482.03 556.09,-487.03 v1(601.34,-487.03) C17.2 R20.1 ; U5.5 v2(627.79,-13.9) 627.79,13.85 667.95,54 815,54 842.3,26.7 842.3,-90.67 ; C15.2 C16.2 842.3,-90.67 ; v3(1153.56,-139.68) 1104.55,-90.67 842.3,-90.67
  Top Layer w50: RV1.2 1078.56,764.22 1078.56,545.2 1146.8,476.97 U2.1
  Bottom Layer w20: v2(442.49,468.9) 442.49,17 473.39,-13.9 v2(627.79,-13.9) ; v1(601.34,-487.03) 761.74,-647.43 1052.17,-647.43 1131.91,-567.69 J4.1@1131.91,-520.6
  Bottom Layer w50: J4.1 1147.23,-494.22 1147.23,-454.21 1153.56,-447.88 1153.56,338.75 1146.8,345.52 U2.1
LoseCurrent: C33.1 D1.2 D2.1 P1.2 R37.1 | length 870.1
  Bottom Layer w12: R37.1 670.52,1436.95 670.52,1382.13 C33.1 667.73,1206.46 D1.2 791.57,1198.48 931.62,1058.44 931.62,940.88 947.11,925.39 1034.36,925.39 P1.2
MAIN_RXD: Q2.3 R22.2 U6.17 | length 406.9
  Top Layer w10: Q2.3 249.84,2131.04 277.71,2158.91 382.61,2158.91 386.63,2154.88 386.63,2137.92 396.81,2127.74 535.28,2127.74 563.45,2099.57 U6.17
MAIN_TXD: Q3.2 U6.18 | length 496.5
  Top Layer w10: Q3.2 125.21,1965.3 164.9,2005 262.55,2005 289.29,1978.26 506.65,1978.26 520.15,1991.76 U6.18
NET_LIGHT: U6.16
NET_STATE: U6.25
NetC5_1: C5.1 L1.1 U3.2 | length 381.5
  Top Layer w12: C5.1 1031.23,1181.23 1066.3,1216.3
  Top Layer w20: U3.2 1100.14,1219.88 1068.4,1219.88 1048.37,1239.9 1048.37,1265.05 1085.32,1302 1120.23,1302 1164.48,1346.25 L1.1
NetC5_2: C5.2 U3.6 | length 63.2
  Top Layer w15: C5.2 966.23,1128.23 982.19,1144.19 U3.6
NetC18_1: C18.1 Q3.1 R21.1 | length 188.2
  Top Layer w10: R21.1 106.61,1772.73 C18.1 107.09,1880.25 117.33,1890.5 Q3.1
NetC23_1: C23.1 Q2.1 R23.1 | length 115.5
  Top Layer w20: R23.1 C23.1 151.48,2164.57 ccw(c151.48,2168.44) Q2.1
NetC28_1: C28.1 R30.1 U7.7 | length 154.4
  Top Layer w20: R30.1 971.17,2000.85 1029.23,2000.85 C28.1 1031.82,2000.76 1046.95,1985.63 U7.7
NetC29_2: C29.2 R29.2 R31.2 U7.3 | length 199.3
  Top Layer w20: R29.2 C29.2 ; U7.3 1096.95,1612.97 1106.58,1603.34 R31.2
NetC30_1: C30.1 R32.1 U7.6 | length 150.6
  Top Layer w20: U7.6 1096.8,1913.6 1096.8,1957.86 1089.34,1965.32 R32.1 C30.1
NetC31_1: C31.1 R34.2 R39.2 | length 113
  Bottom Layer w20: R34.2 C31.1 363.3,1625.66 417.75,1625.66 R39.2
NetC31_2: C31.2 R1.1 U9.4 | length 132.5
  Bottom Layer w12: C31.2 364.55,1689.41 383.2,1708.07 U9.4 386.28,1739.18 R1.1
NetC32_1: C32.1 R34.1 R35.2 | length 232.4
  Bottom Layer w12: R34.1 363.3,1505.68 417.75,1505.68 C32.1 424.22,1501.71 424.22,1478.46 465.44,1437.24 R35.2
NetC36_1: C36.1 R43.2 R44.1 U8.5 | length 210
  Bottom Layer w12: R44.1 516.19,1882.36 633.09,1882.36 R43.2 ; U8.5 558.09,1868.1 572.24,1882.26 C36.1
NetJ5_1: J5.1 R13.1 | length 382.6
  Top Layer w30: v1(736.56,-268.07) 764.99,-268.07 790.1,-242.96 R13.1
  Bottom Layer w30: J5.1 499.45,-334.65 566.24,-267.86 736.35,-267.86 v1(736.56,-268.07)
NetJ6_1: J6.1 R14.1 | length 511.1
  Top Layer w30: R14.1 789.57,5.15 v1(790.35,5.93)
  Bottom Layer w30: J6.1 690.25,-341.75 763.82,-341.75 819.44,-286.13 819.44,-210.7 790.1,-181.36 790.1,5.68 v1(790.35,5.93)
NetJ7_1: J7.1 R12.1 R33.2 | length 171.4
  Bottom Layer w12: R33.2 R33.2@395.38,1925.85 ; J7.1 402.1,2011.57 402.1,1932.57 R33.2@395.38,1925.85 ; R12.1 R33.2@395.38,1925.85
NetJ8_1: J8.1 R33.1 R36.2 | length 170.8
  Bottom Layer w12: R36.2 R36.2@242.63,1928.57 ; J8.1 256.27,2010.08 256.27,1942.22 R36.2@242.63,1928.57 ; R33.1 293.1,1928.57 R36.2@242.63,1928.57
NetQ1_1: Q1.1 R8.1 R9.1 | length 118
  Top Layer w10: R9.1 R8.1 432.94,-286.13 Q1.1@479.82,-286.13
NetQ1_3: Q1.3 U5.1 | length 316.1
  Top Layer w15: v1(545.71,-215.7) 545.71,-236.91 571.59,-262.79 Q1.3@571.59,-322.74 ; U5.1 628.26,-218.77 684.51,-218.77 v1(684.98,-219.24)
  Bottom Layer w15: v1(545.71,-215.7) 582.18,-215.7 585.71,-219.24 v1(684.98,-219.24)
NetQ4_1: Q4.1 R27.2 R28.1 | length 120.2
  Top Layer w10: Q4.1 41.61,1507.94 R27.2
NetR1_2: R1.2 R12.2 U9.3 | length 129.9
  Bottom Layer w12: U9.3 436.55,1848.55 448.85,1860.85 R12.2 R1.2
NetR2_2: R2.2 R3.1 U3.4 | length 192.6
  Top Layer w15: R3.1 906.33,1127.38 906.33,1189.39 R2.2 910.61,1196.97 933.07,1196.97 941.85,1205.76 941.85,1241.64 954.99,1254.78 979.85,1254.78 U3.4
NetR4_2: R4.2 R6.2 U4.6 | length 121.2
  Top Layer w20: R4.2 174.52,-585.76 174.52,-470.08 U4.6
NetR5_2: R5.2 R7.1 U4.3 | length 119.5
  Top Layer w20: U4.3 103.33,-368.03 103.33,-314.14 R5.2 R7.1
NetR15_1: R15.1 R16.2 | length 89
  Top Layer w30: R16.2@1149.05,-351.21 1153.34,-346.92 R16.2
  Top Layer w40: R15.1 1076.06,-352.77 1078.56,-350.27 1149.92,-350.27 R16.2@1153.3,-346.89
NetR16_1: R16.1 R17.2 | length 73.1
  Top Layer w40: R16.1 1155.16,-428.74 1155.16,-500.04 R17.2
NetR17_1: R17.1 R18.2 | length 79.3
  Top Layer w40: R18.2 1081.08,-578.2 1153.31,-578.2 R17.1
NetR18_1: R18.1 R19.2 | length 70.3
  Top Layer w40: R19.2@928.31,-575.69 R18.1
NetR25_2: R25.2 R35.1 U8.3 | length 314.2
  Bottom Layer w12: R35.1 559.89,1511.24 566.59,1511.24 601.87,1546.52 604.24,1546.52 608.09,1550.36 608.09,1625.04 636.9,1653.85 R25.2
NetR36_1: R36.1 R40.2 U9.1 | length 136.9
  Bottom Layer w12: R40.2 R36.1 302.24,1863.57 308.4,1857.41 U9.1
NetR37_2: R37.2 R41.1 U8.1 | length 142.8
  Bottom Layer w12: U8.1 708.09,1550.36 729.3,1529.14 729.3,1511.24 R41.1 R37.2
NetR38_1: R38.1 R41.2 U8.2 | length 134.5
  Bottom Layer w12: R38.1 R41.2 673.3,1537.74 664.53,1546.52 661.93,1546.52 658.09,1550.36 U8.2
NetS1_1: S1.1 U6.35 | length 161.1
  Top Layer w20: S1.1 96.88,1424.33 cw(c116.61,1424.33) 116.61,1444.06 U6.35
Nin: J3.1 R15.2 RV1.1 U2.2 | length 1190.8
  Top Layer w40: v3@911.91,-354.83 911.75,-354.83 911.26,-354.33 R15.2
  Bottom Layer w50: RV1.1 784.6,518.46 946.8,356.26 U2.2 ; J3.1 904.13,-362.11 945.45,-320.79 U2.2@945.45,351.95
  other v3: 911.91,-354.33
PWR_ON/OFF: R26.1 U6.7 | length 98.4
  Top Layer w10: U6.7 916.7,1703.9 926.84,1714.05 R26.1
Relay_C_A: P1.11 R7.2 | length 1476.5
  Top Layer w10: R7.2 v1(230.88,-251.97) ; v1(362.04,-2.98) 360.13,-1.07 360.13,6 358.44,7.68 358.44,45.18 576.46,263.2 576.46,268.5 576.6,268.64 576.6,798.35 627,848.75 627,932.75 P1.11
  Bottom Layer w10: v1(230.88,-251.97) 316.72,-166.13 316.72,-48.31 v1(362.04,-2.98)
Relay_C_B: P1.10 R6.1 | length 1800.2
  Top Layer w10: v1(71.49,-528.58) 106.37,-528.58 R6.1 ; v1(383.44,18.04) 385.36,19.95 385.36,39.11 595.64,249.39 595.64,792.34 P1.10
  Bottom Layer w10: v1(71.49,-528.58) 71.91,-529 179.56,-529 211.72,-496.84 211.72,-413.77 205.88,-407.93 205.88,-237.06 246.17,-196.76 251.61,-196.76 301.72,-146.66 301.72,-21.53 350.6,27.36 371.42,27.36 380.74,18.04 v1(383.44,18.04)
Relay_O_A: J1.1 U4.4 | length 123.4
  Top Layer w20: v3(82.01,-424.07) 85.84,-427.9 85.84,-442.74 101.52,-458.43 U4.4
  Bottom Layer w20: J1.1 80.37,-355.96 80.37,-422.44 v3(82.01,-424.07)
Relay_O_B: J2.1 U4.1 | length 125.4
  Top Layer w20: U4.1 177.11,-369.06 241.37,-369.06 v3(242.15,-368.28)
  Bottom Layer w20: v3(242.15,-368.28) 245.98,-364.46 285.15,-364.46 J2.1
RESET_N: C26.2 Q4.3 U6.15 | length 1286.3
  Top Layer w12: v1(56.34,1713.69) Q4.3 ; U6.15 650.07,2099.57 681.54,2131.04 v1(720.8,2131.04) 751.36,2100.48 C26.2
  Bottom Layer w12: v1(56.34,1713.69) 19.01,1751.01 19.01,2051.5 80.91,2113.39 531.36,2113.39 534.77,2109.98 699.74,2109.98 v1(720.8,2131.04)
USIM_CLK: R32.2 U6.13 | length 338.4
  Top Layer w10: U6.13 866.84,1963.75 873.14,1970.04 873.14,2028.64 878.99,2034.49 1069.69,2034.49 1078.38,2043.18 1078.38,2055.94 1088.38,2065.94 R32.2
USIM_DATA: R31.1 U6.11 | length 542.8
  Top Layer w10: U6.11 912.24,1877.13 969.59,1819.77 969.59,1600.47 1000.72,1569.34 1075.58,1569.34 1106.58,1538.34 R31.1
USIM_DET: U6.79
USIM_RST: R30.2 U6.12 | length 486.5
  Top Layer w10: U6.12 832.5,1923.05 779.98,1923.05 765.52,1937.5 765.52,1984.89 781.38,2000.76 846.73,2000.76 852.59,2006.62 852.59,2090.86 882.74,2121.01 964.44,2121.01 971.08,2114.37 R30.2
USIM_VDD: C27.2 R29.1 U6.14 U7.8 | length 932.4
  Top Layer w20: U6.14 693.37,2013.94 702.54,2004.77 715.19,2004.77 v2(717.1,2002.86) ; 912.04,1983.15 912.04,1964.33 943.02,1933.36 v2(943.02,1931.67) 944.93,1929.75 996.8,1929.75 996.95,1929.6 U7.8 ; v2(993.58,1538.34) 993.68,1538.25 1050.23,1538.25 R29.1
  Bottom Layer w20: v2(717.1,2002.86) 871.83,2002.86 v2(943.02,1931.67) 943.02,1588.91 v2(993.58,1538.34)
VCC12: C3.1 C4.2 C6.2 C7.1 C11.2 C12.2 U2.5 U3.3 U3.5 U4.5 | length 3314
  Top Layer w15: U3.5 982.6,1220.13 v2(1015.3,1220.13)
  Top Layer w30: U4.5@141.52,-461.62 141.52,-424.52 147.2,-418.84 201.84,-418.84 219.42,-436.41 219.42,-482.15 236.99,-499.72 C11.2@254.3,-499.72 ; C11.2 C12.2@326.23,-500.99 ; U3.3 1144.72,1257.12 1169.25,1232.59 1169.25,1106.37 1181.8,1093.82 v3(1181.8,1004.61)
  Top Layer w50: C3.1@226.09,631.7 226.09,471.32 228.25,469.16 228.25,401.76 U2.5
  Bottom Layer w15: v2(1015.3,1220.13) 1128.67,1220.13 1153.4,1244.85 v2(1156.99,1244.85)
  Bottom Layer w20: C3.1 242,647.36 830.28,647.36 911.57,566.07 1116.55,566.07 1200.47,649.99 1200.47,914.63 1181.8,933.31 v3(1181.8,1004.61)
  Bottom Layer w30: v2(141.52,-424.52) 146.72,-419.32 146.72,-249.06 257.69,-138.08 257.69,321.08 276.72,340.1 U2.5
VCC33: C1.1 C8.2 C9.1 C10.2 C19.1 C20.1 C21.1 C22.1 C24.2 C25.2 C34.2 C35.2 D1.1 L1.2 P1.3 R2.1 R24.2 R43.1 U1.2 U6.42 U6.43 U8.8 U9.5 | length 7292.3
  Top Layer w10: R2.1 839.68,1193.55 870.41,1224.28 870.41,1246.78 C9.1
  Top Layer w20: R24.2 105.2,2038.78 v1(105.2,2006.92) ; v1(425.02,1241.64) 493.96,1241.64 C19.1 522.07,1257.9 711.55,1257.9 C20.1 718.02,1253.93 751.36,1287.27 751.36,1355.48 781.65,1385.77 v3(808.9,1385.77) ; C22.1 601.07,1253.93 606.07,1258.93 606.07,1350.85 U6.42 U6.43 ; v1(650.57,1971.1) 697.69,1971.1 758.57,1910.23 v1(758.57,1893.83)
  Top Layer w40: C1.1 306.58,749.38 241.08,814.88 241.08,932.09 U1.2 ; C9.1 887.91,1269.28 890.41,1271.78 907.19,1271.78 934.67,1299.26 934.67,1333.91 936.31,1335.55 C10.2 ; v3(937.07,1449.18) 935.19,1447.3 935.19,1396.77 C10.2 ; L1.2 998.85,1395.66 C10.2
  Bottom Layer w10: v1(105.2,2006.92) 105.2,2066.44 116.29,2077.54 169.85,2077.54 180.35,2067.03 180.35,1435.59 374.3,1241.64 v1(425.02,1241.64)
  Bottom Layer w20: U9.5 307.57,1741.43 307.57,1691.28 C34.2 303.37,1685.59 303.37,1450.43 467.37,1286.43 467.37,1241.64 ; U1.2 256.61,947.62 256.61,825.49 325.47,756.63 780.94,756.63 934.82,602.75 1095.24,602.75 1169.76,677.27 1169.76,844.34 1133.84,880.26 1133.84,1051.27 1101.49,1083.63 1035.06,1083.63 988.99,1037.57 ; v1(425.02,1241.64) 467.37,1241.64 ; D1.1 533.77,1203.92 513.77,1223.92 485.1,1223.92 467.37,1241.64 ; R43.1 635.89,1947.06 640.89,1952.06 R43.1@640.89,1961.42 ; v1(650.57,1971.1) 650.57,2031.83 671.07,2052.33 1044.73,2052.33 1186.53,1910.53 1186.53,1511.92 1070.27,1395.66 937.07,1395.66 ; U8.8 708.09,1798.13 708.24,1797.97 760.85,1797.97 761.27,1798.39 C25.2 758.57,1859.4 v1(758.57,1893.83) ; v3(808.9,1385.77) 927.18,1385.77 937.07,1395.66 ; v3(937.07,1449.18) 937.07,1395.66 ; P1.3 988.99,985.7 988.99,1037.57 ; 937.07,1395.66 937.07,1351.08 932.31,1346.31 932.31,1253.62 988.99,1196.94 988.99,1037.57
VCC33_G: C2.1 C13.2 C14.2 P1.6 Q1.2 R8.2 R10.2 R11.2 U1.4 U5.8 | length 3241.2
  Top Layer w20: C2.1 64.81,948.33 77.06,948.33 v2(126.83,998.11) 126.83,1083.63 U1.4 305.18,1188.36 437.74,1055.8 876.5,1055.8 931.62,1000.68 931.62,928.33 P1.6 ; v1(204.04,-109.74) 205.55,-109.74 220.59,-124.78 232.73,-124.78 R10.2 ; R10.2@235.23,-129.78 R11.2 338.64,-129.78 348.42,-139.55 U5.8 410.86,-139.68 459.49,-139.68 478.07,-158.26 478.07,-210.55 535.31,-267.79 535.31,-309.38 483.76,-360.94 Q1.2@482.31,-360.94 ; R8.2 426.23,-359.91 478.79,-359.91 479.82,-360.94 Q1.2@482.31,-360.94 ; v3(432.4,-482.57) 432.81,-482.17 485.69,-482.17 C14.2 486.09,-364.72 Q1.2@482.31,-360.94
  Bottom Layer w20: v2(126.83,998.11) 37.39,908.67 37.39,468.9 91.83,414.46 91.83,2.47 v1(204.04,-109.74)
VDD_1.65V: C37.1 R25.1 U8.6 U8.7 | length 314.1
  Bottom Layer w12: U8.6 U8.7 ; C37.1 688.93,1882.06 658.09,1851.22 U8.7 ; R25.1 683.45,1718.85 658.09,1744.22 U8.7
VDD_EXT: C18.2 C23.2 R21.2 R22.1 R23.2 U6.24 | length 1077.1
  Top Layer w10: C18.2 42.09,1833.82 42.09,1855.95 75.03,1888.89 75.03,1913.6 83.3,1921.87 ; R23.2 60.33,2099.57 ; v1(60.33,2129.58) 60.33,2099.57 ; C23.2 93.35,2106.24 93.35,2105.39 87.53,2099.57 75.03,2099.57 ; U6.24 127.49,1920.44 120.03,1927.9 89.33,1927.9 88.79,1927.36 83.3,1921.87 ; R22.1 450.37,2163.81 v1(501,2163.81) ; 60.33,2099.57 75.03,2099.57 ; 75.03,2099.57 75.03,1930.13 83.3,1921.87
  Bottom Layer w10: v1(60.33,2129.58) 100.82,2129.58 117.94,2146.71 117.94,2148.81 132.94,2163.81 v1(501,2163.81)
VP: C17.1 R19.1 R20.2 U5.4 | length 769
  Top Layer w10: U5.4 576.6,-100.18 570.74,-106.04 570.74,-228.43 606.66,-264.35 679,-264.35 711.6,-296.95 C17.1 R20.2 711.6,-582.75 717.46,-588.61 836.44,-588.61 R19.1
pads on no net: P1.1 U5.6 U5.7 U6.2 U6.3 U6.4 U6.5 U6.6 U6.8 U6.9 U6.19 U6.20 U6.21 U6.22 U6.23 U6.26 U6.28 U6.29 U6.30 U6.31 U6.32 U6.33 U6.38 U6.39 U6.44 U6.49 U6.50 U6.51 U6.52 U6.53 U6.54 U6.55 U6.56 U6.57 U6.58 U6.59 U6.60 U6.61 U6.62 U6.63 U6.64 U6.65 U6.66 U6.67 U6.68 U6.69 U6.74 U6.75 U6.76 U6.77 U6.78 U6.80 U6.81 U6.82 U6.83 U6.84 U6.85 U6.86 U6.87 U7.0 U7.2 U7.4 U7.5
copper on no net:
  other v1: 450.2,-620.22 512.96,-98.9

## Polygon pours and split planes (outlines as drawn)
GND on Top Layer "NONET_L-01_P-001" (solid, remove dead copper, pour order 0): -243,2331 -229,2345 1436,2345 1436,860 1406.22,830.22 839.12,830.22 618.36,609.45 618.36,136.9 410.73,-70.72 410.73,-685 221,-874.73 221,-908 -274,-908 -391,-791 -391,2181 -241,2331
GND on Bottom Layer "NONET_L-01_P-001" (solid, remove dead copper, pour order 1): -277.09,2322.33 -263.09,2336.33 1401.91,2336.33 1401.91,851.33 1387.68,837.1 841.98,837.1 563.03,558.15 563.03,107 376.64,-79.4 376.64,-693.67 186.91,-883.41 186.91,-916.67 -308.09,-916.67 -425.09,-799.67 -425.09,2172.33 -275.09,2322.33

## Keep-outs
Keep-Out Layer:
  lines w10: 0,-669.29 0,2204.72 570.87,2204.72 570.87,2125.98 649.61,2125.98 649.61,2204.72 1220.47,2204.72 1220.47,-669.29 649.61,-669.29 649.61,-590.55 570.87,-590.55 570.87,-669.29 0,-669.29
  lines w20: 1012.22,828.23 1110.34,828.23 1136.17,802.4 1136.17,716.53 1124.45,704.82 1124.18,704.82
  lines w30: 582.18,71.31 582.18,144.13 659.27,221.22 659.27,548.67 700.24,589.64 814.69,589.64 882.89,521.44 988.56,521.44 ; 1003.72,-149.81 1003.72,-204.62 1076.06,-276.97 ; 1047.3,-43.1 1047.3,449.84

## Silkscreen, mask and mechanical layers (free items; w line width, h text height)
Top Overlay:
  lines w10: 132.09,1799.75 146.15,1785.68 146.15,1456.06 175.38,1426.83 175.38,1345.96 211.59,1309.75 256.27,1309.75 ; 399.1,828.24 478.07,828.24 ; 432.2,561.22 432.2,827.04
  lines w60: 1079.87,765.53 1079.87,543.89 1146.8,476.97 1146.8,380
  text "SinglePower-4G-V1" at 74.72,494.16 h60 r270
  text "20260114" at 26.44,493.9 h60 r270
Bottom Overlay:
  lines w10: 0,0 1220.47,0 ; 0,1511.81 1218,1511.81
  text "漏电流" at 222.33,1982.04 h70
  text "接采样电阻" at 622.46,-89.44 h100 r90
  text "继电器" at 217.31,-126.68 h100 r90
  text "正极" at 518.92,-148.35 h78.74 r90
  text "负极" at 694.62,-149.81 h78.74 r90
  text "B" at 100.5,-266.51 h100
  text "A" at 276.72,-273.44 h100
  text "火线" at 1073.38,-473.84 h100 r90
  text "零线" at 849.38,-480.09 h100 r90

## Text inside footprints (layer, text, board x,y; h text height)
C3: Top Overlay "+" at 240.33,602.7 h60 r180
U2: Top Overlay "ACL" at 1182.54,166.71 h100 r90; Top Overlay "ACN" at 979.66,157.71 h100 r90; Top Overlay "V+" at 319.34,417.2 h100 r90; Top Overlay "GND" at 409.34,417.2 h100 r90